# Altium PCB correctCore.PcbDoc (part 1 of 2)
Units mil, origin at the board's own origin, x right, y up, seen from the top; angles counter-clockwise.
Board outline 4175 x 4095 mil, 4 copper layers (Top Layer, GND, PWR, Bottom Layer), stack 43.711 mil thick; 90 components, 157 nets, 637 pads, 423 vias.
Unrouted connection lines stored in the file: 94.
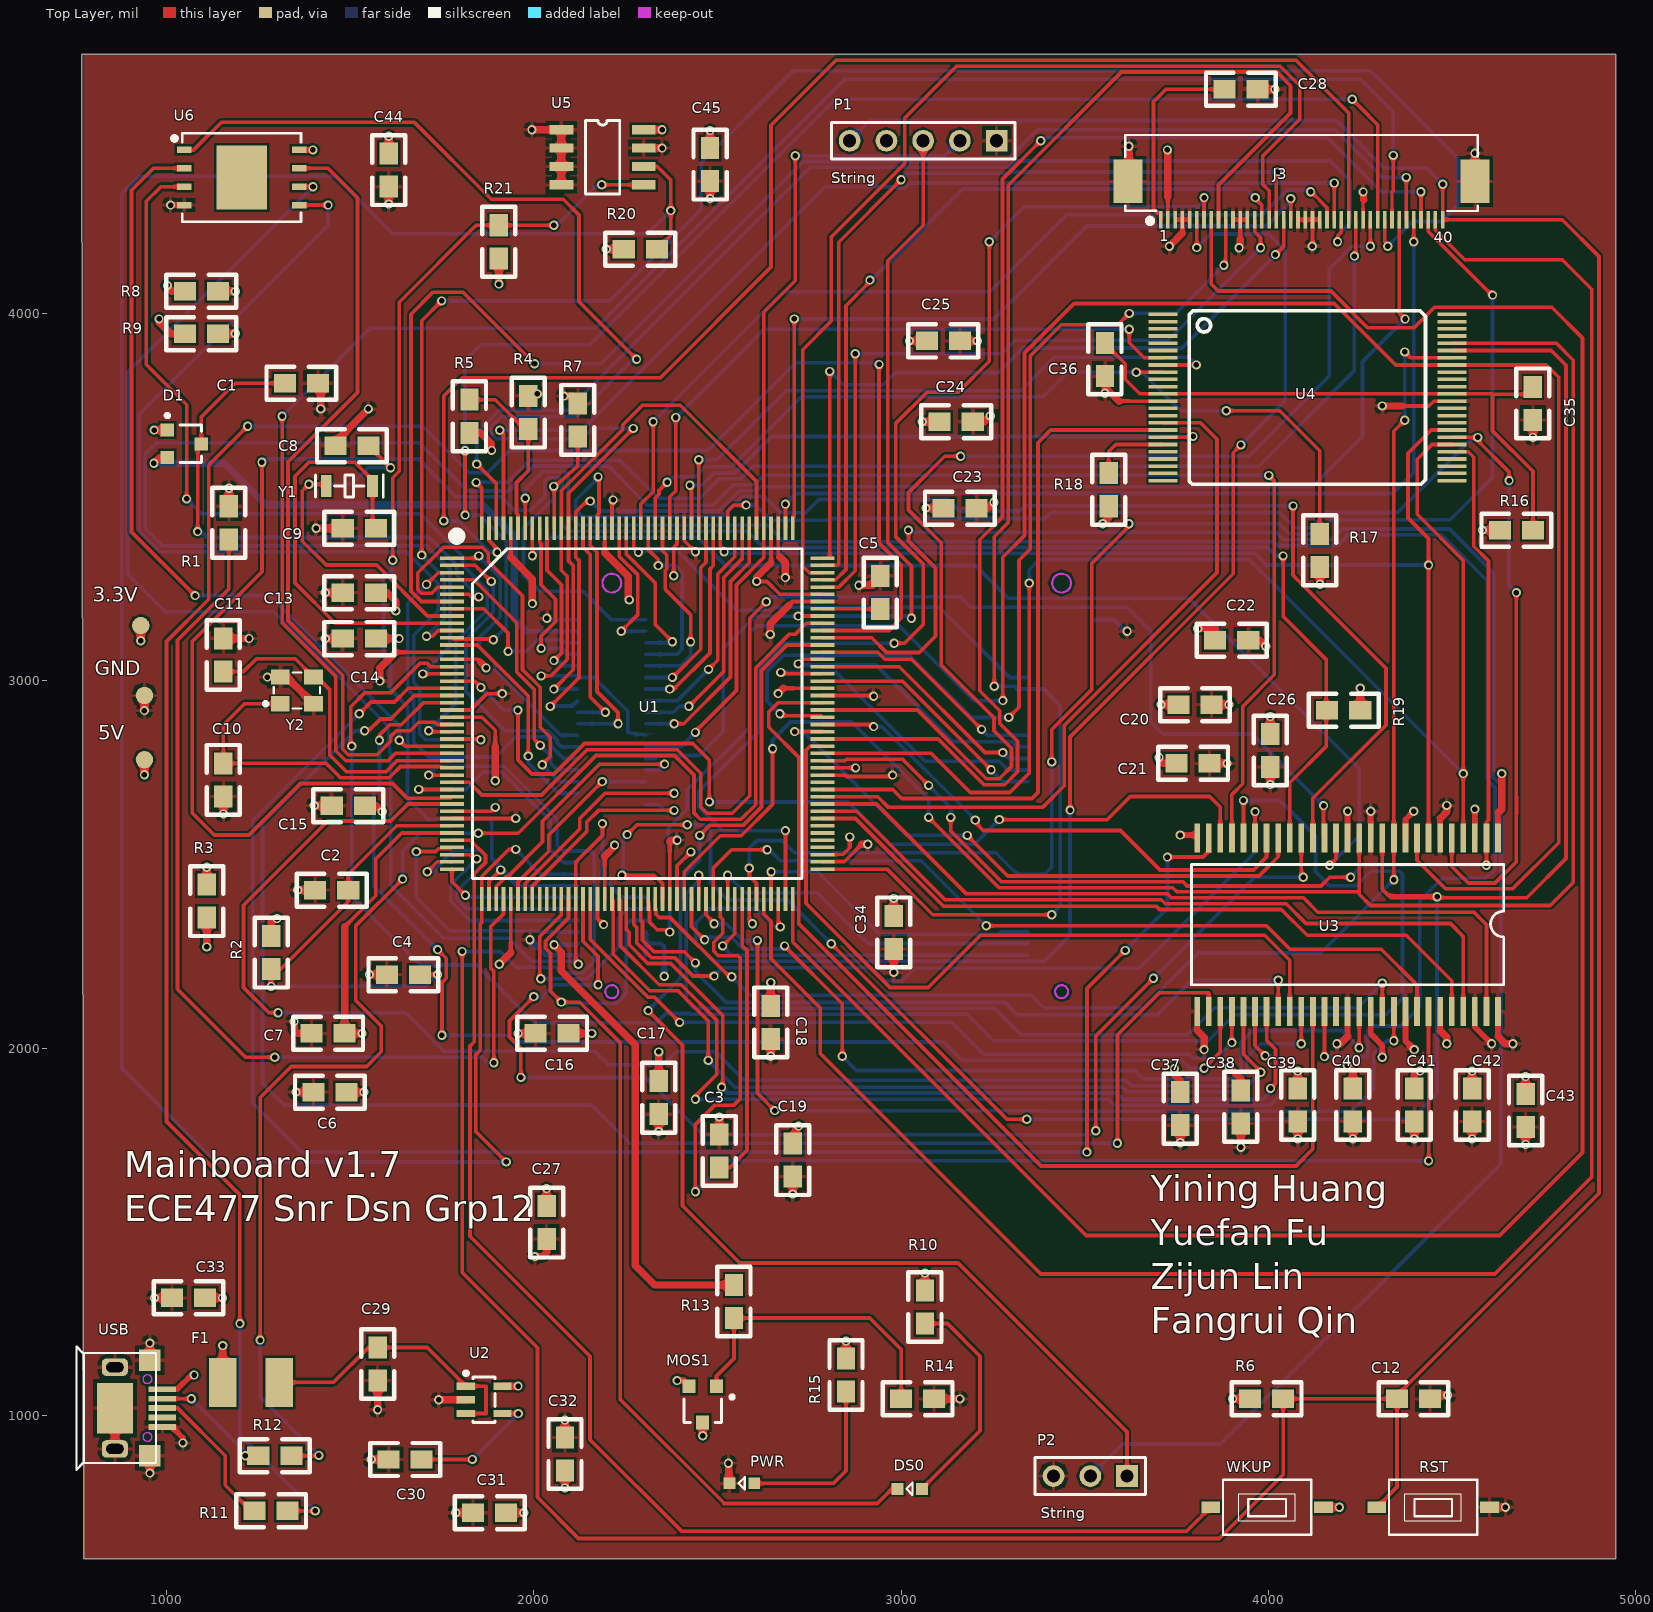
[diagram p0: Top Layer view]
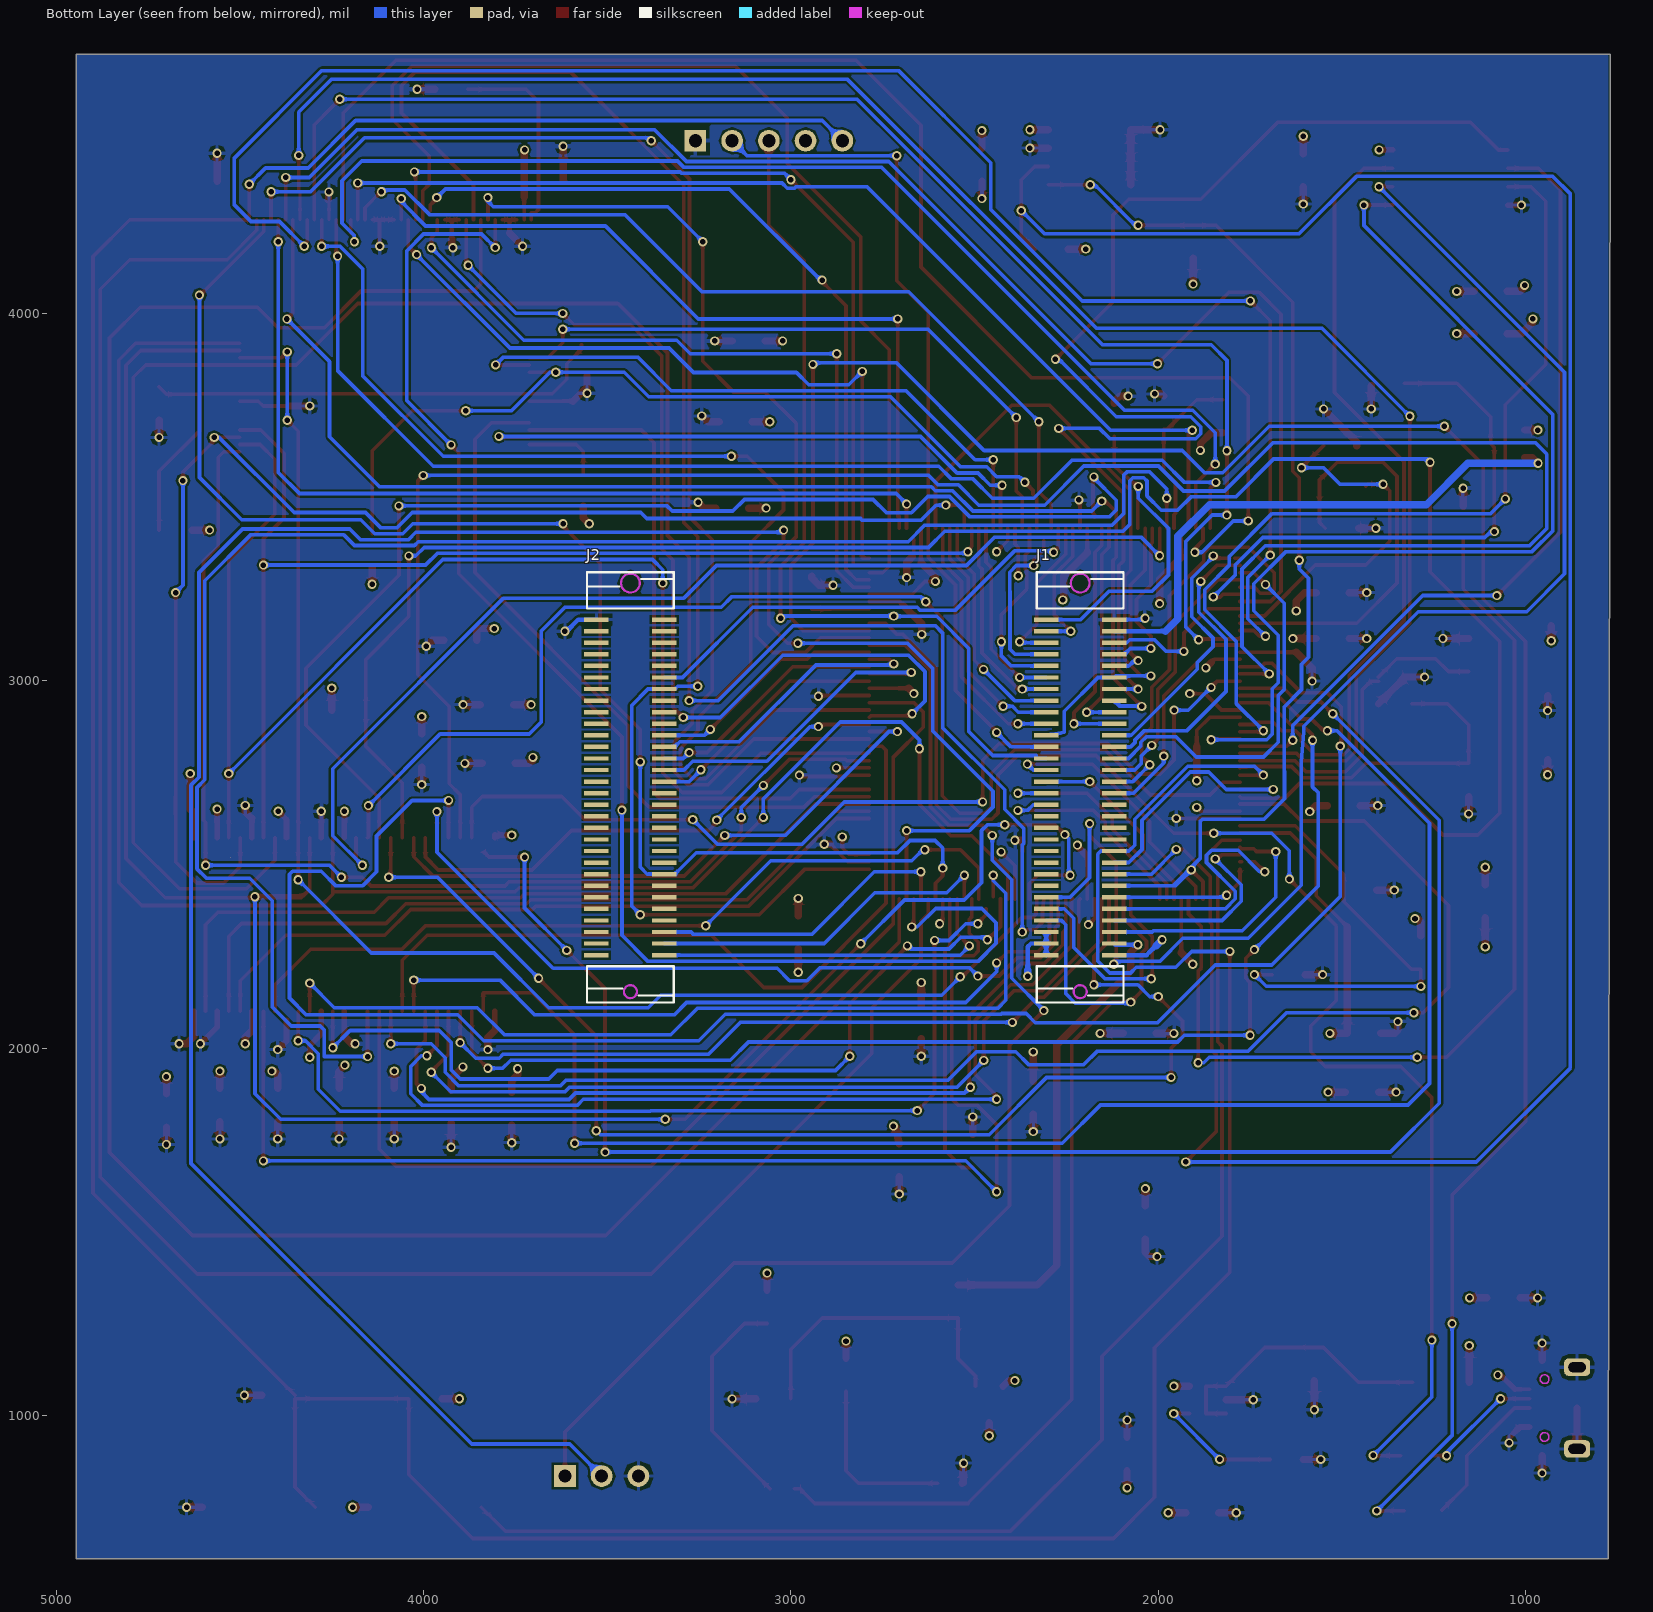
[diagram p1: Bottom Layer view, seen from below]
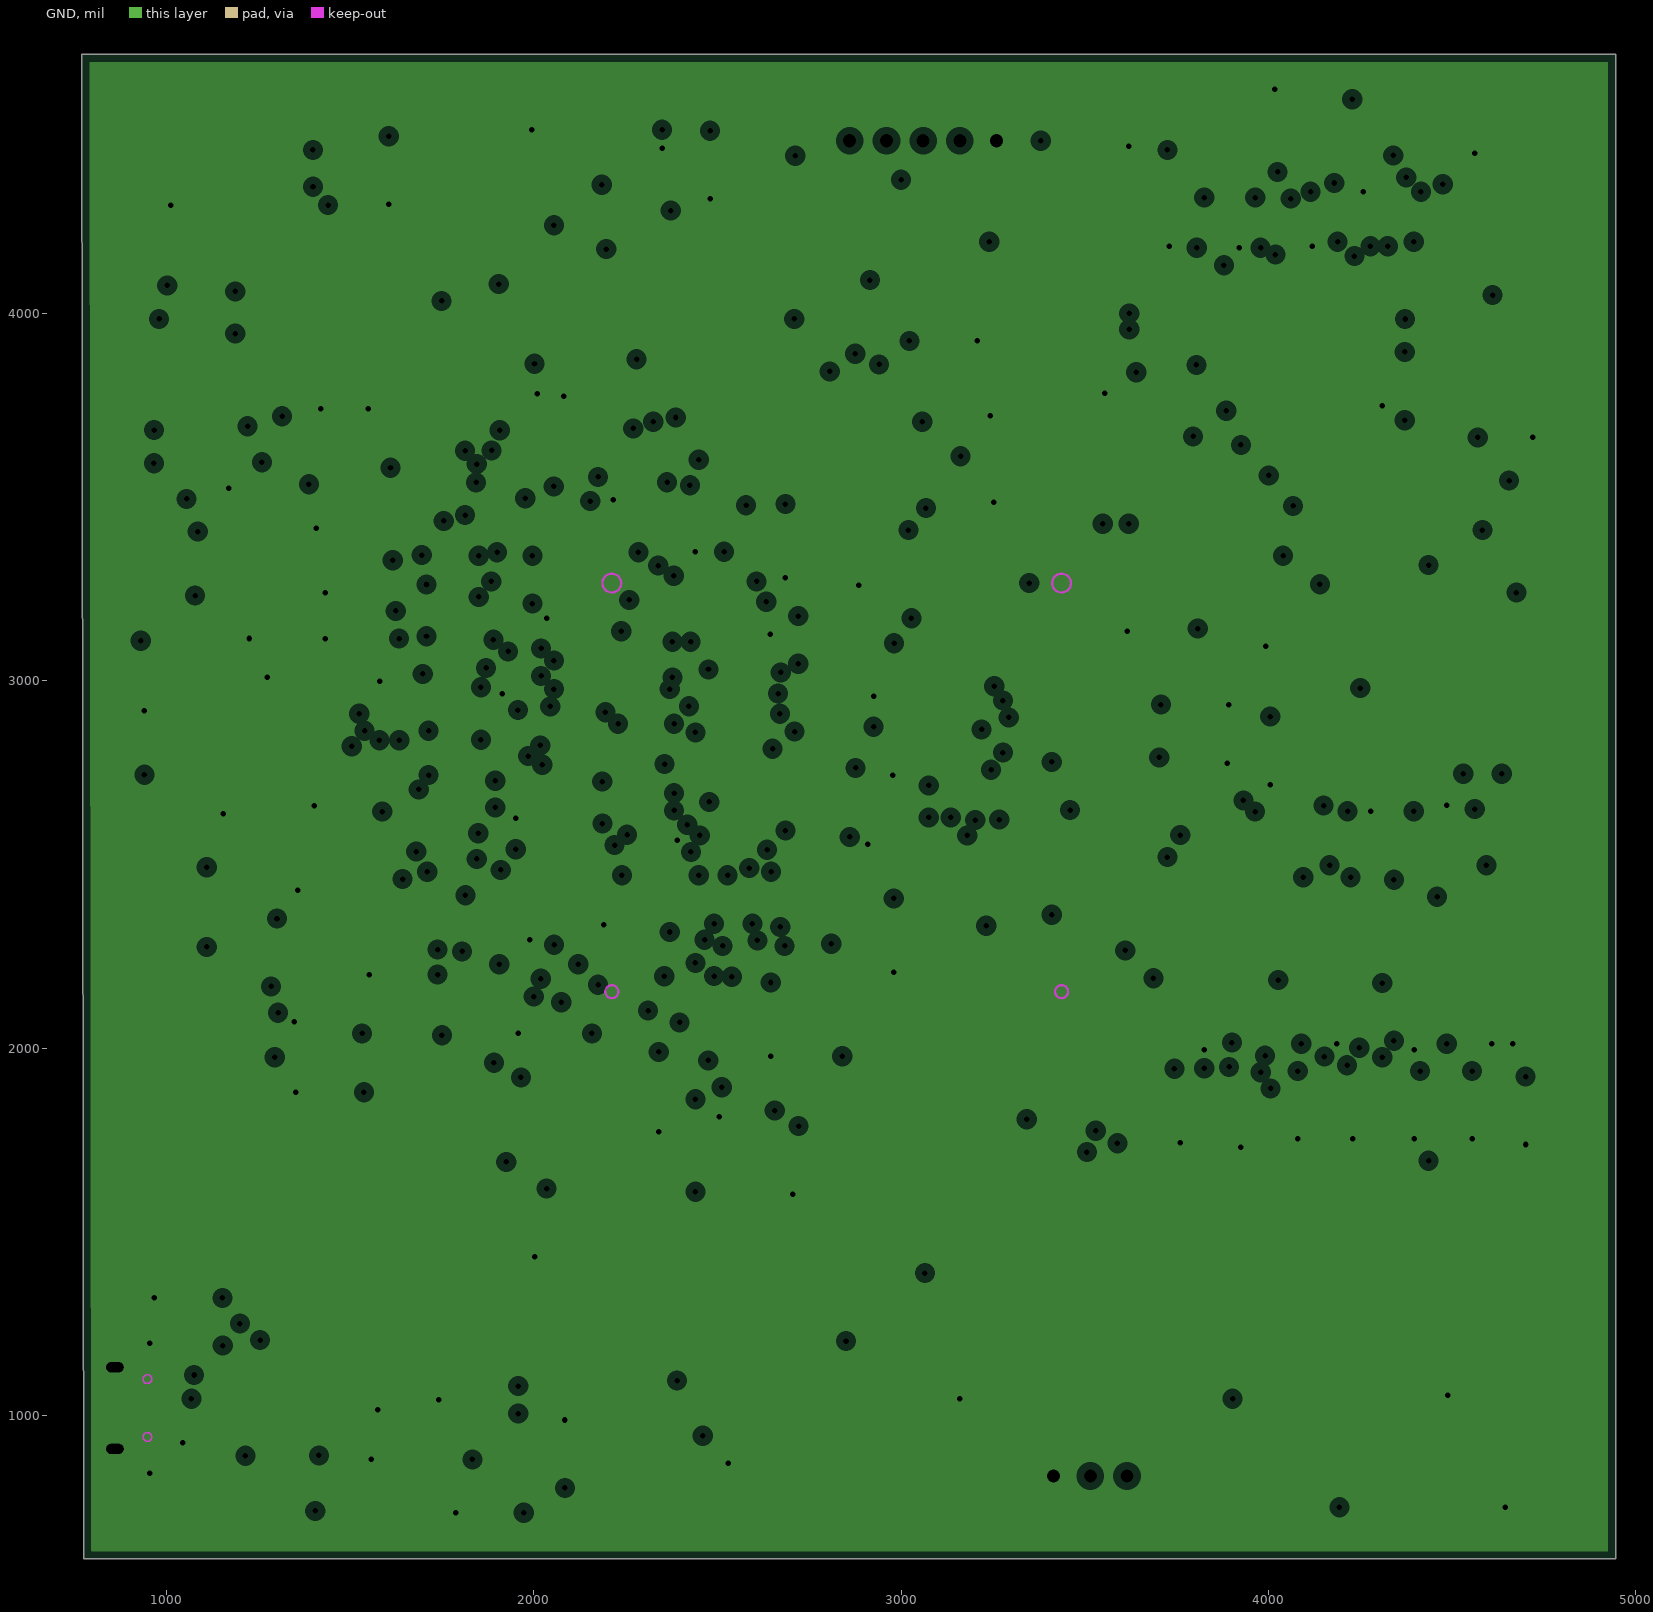
[diagram p2: GND, clearances drawn from the general rule]
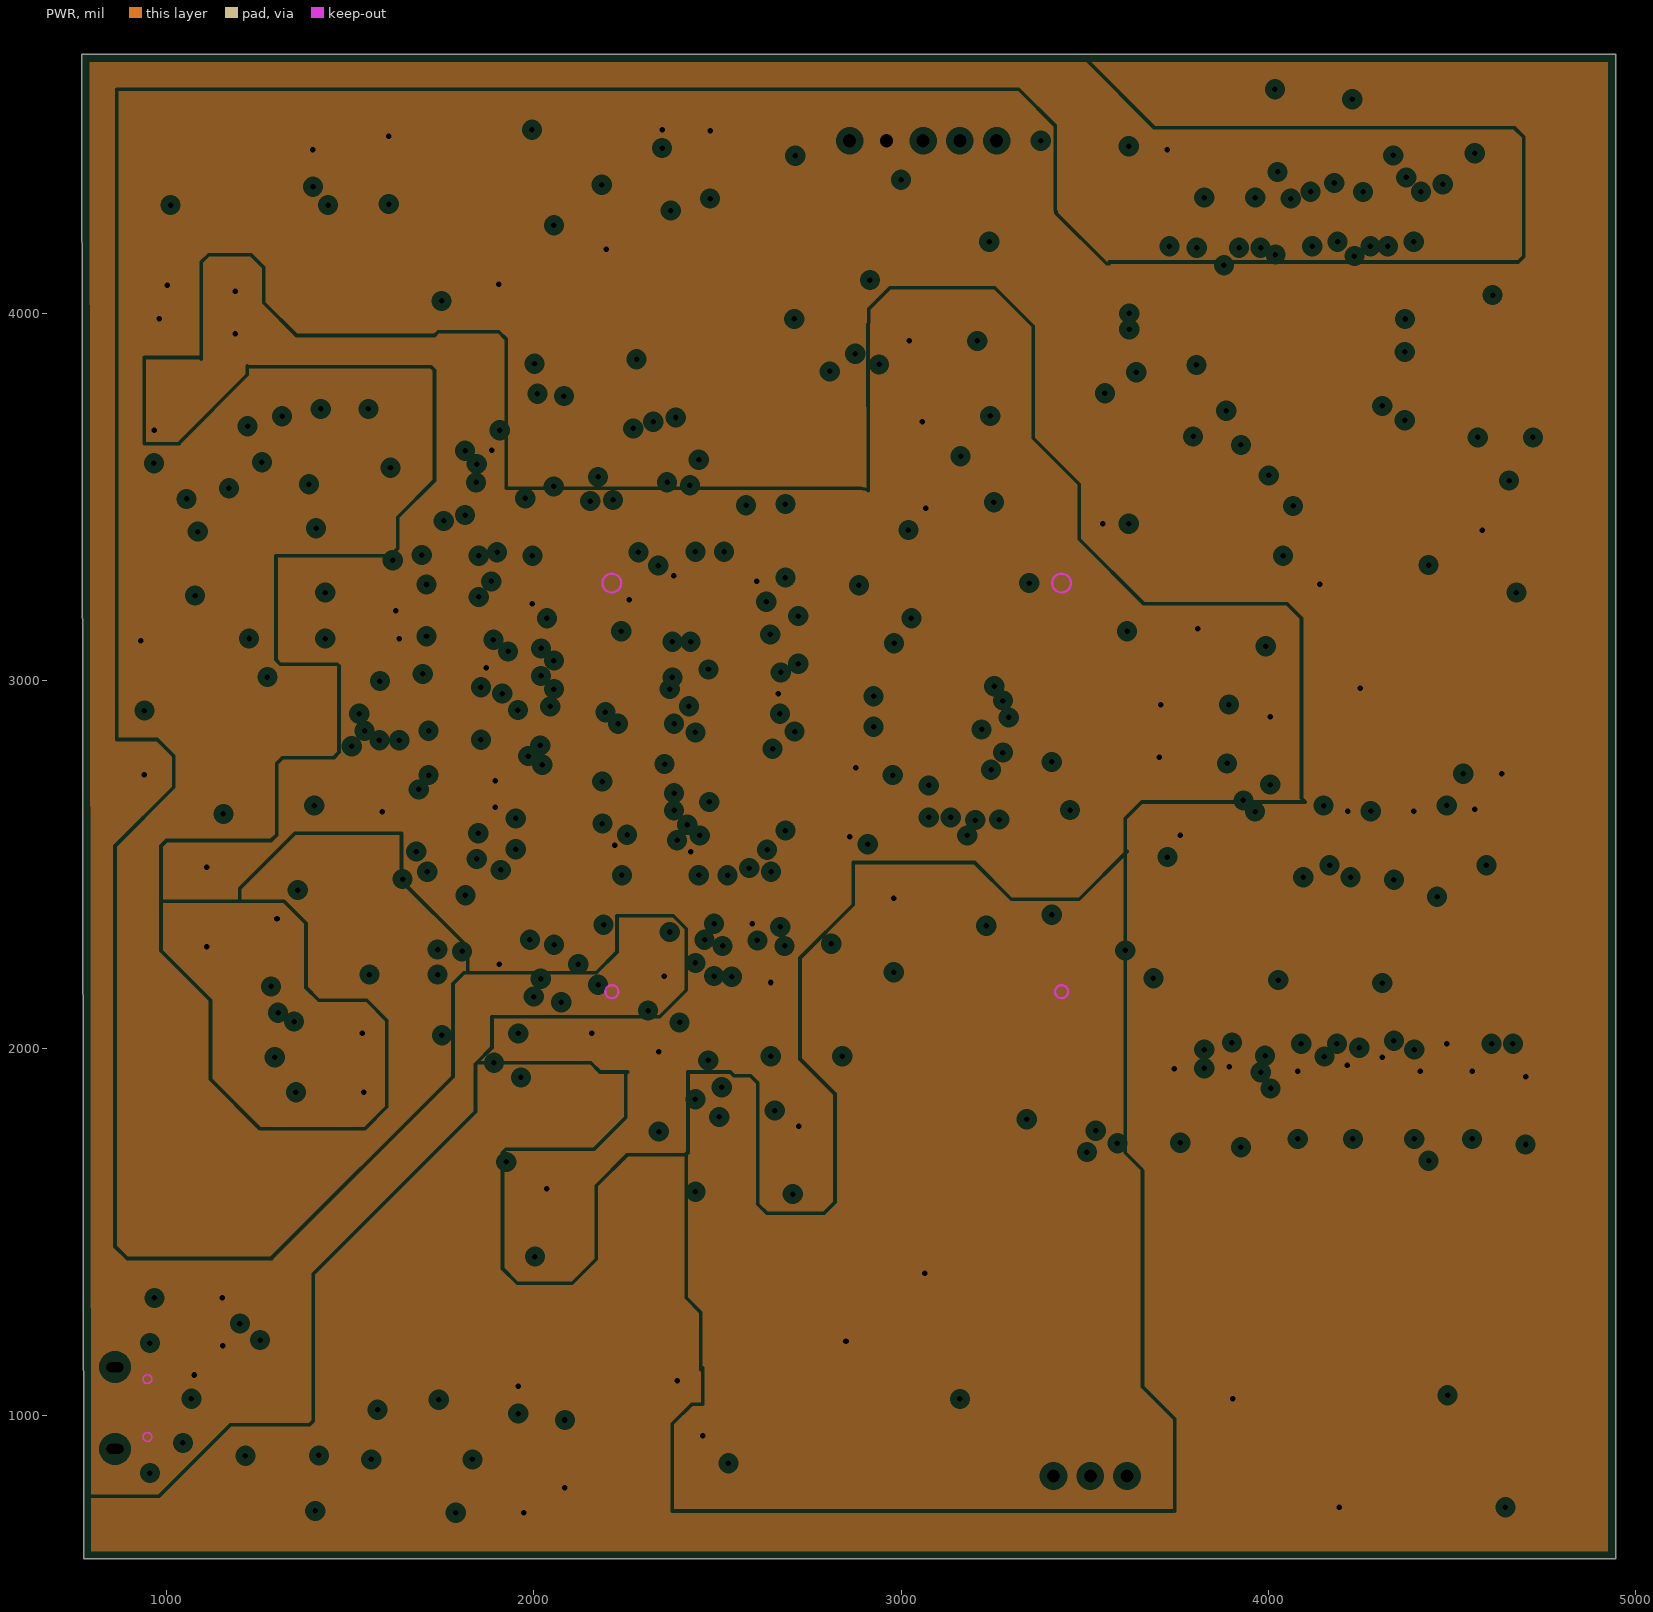
[diagram p3: PWR, clearances drawn from the general rule]

## Layer stack, top to bottom
Top Solder: solder mask 1, SM-001, Dk 4
Top Layer: signal copper 1.3778
Dielectric 1: prepreg 5.1, PP-017, Dk 4.3
GND: plane copper 1.3778, net GND
Dielectric 2: core 28, Core-039, Dk 4.8
PWR: plane copper 1.3778, net (Multiple Nets)
Dielectric 3: prepreg 5.1, PP-017, Dk 4.3
Bottom Layer: signal copper 1.3778
Bottom Solder: solder mask 1, SM-001, Dk 4

## Board outline
770,4705 4945,4705 4945,610 775,610
cut-out: 4525,2520

## Design rules (kind name [scope] priority, off if disabled: settings)
Clearance Clearance_1 [All] p1: gap=6 ignorepadtopadclearanceinfootprint=TRUE except(0: Arc-Hole Track-Hole SMDPad-Hole THPad-Hole Via-Hole Fill-Hole Poly-Hole Region-Hole Text-Hole)
Clearance Clearance_gnd [(InPolygon)] p2: gap=20 ignorepadtopadclearanceinfootprint=TRUE except(0: Arc-Hole Track-Hole SMDPad-Hole THPad-Hole Via-Hole Fill-Hole Poly-Hole Region-Hole Text-Hole)
ComponentClearance [All] p1 off: gap=10 collisioncheckmode=3 verticalgap=10 showdistances=FALSE
DiffPairsRouting [All] p1 off: maxlimit=10 minlimit=10 mostfreqgap=10 toplayer_minwidth=15 toplayer_maxwidth=15 toplayer_prefwidth=15 bottomlayer_minwidth=15 bottomlayer_maxwidth=15 bottomlayer_prefwidth=15 maxuncoupledlength=500
FanoutControl Fanout_BGA [IsBGA] p1 off: bgadir=Out bgaviamode=Centered fanoutstyle=Auto fanoutdirection=Alternating viagrid=1 // Fanout_BGA (Default Rule)
FanoutControl Fanout_LCC [IsLCC] p2 off: bgadir=Out bgaviamode=Centered fanoutstyle=Auto fanoutdirection=Alternating viagrid=1 // Fanout_LCC (Default Rule)
FanoutControl Fanout_SOIC [IsSOIC] p3 off: bgadir=Out bgaviamode=Centered fanoutstyle=Auto fanoutdirection=Alternating viagrid=1 // Fanout_SOIC (Default Rule)
FanoutControl Fanout_Small [(CompPinCount < 5)] p4 off: bgadir=Out bgaviamode=Centered fanoutstyle=Auto fanoutdirection=OutThenIn viagrid=1 // Fanout_Small (Default Rule)
FanoutControl Fanout_Default [All] p5 off: bgadir=Out bgaviamode=Centered fanoutstyle=Auto fanoutdirection=Alternating viagrid=1 // Fanout_Default (Default Rule)
Height [All] p1 off: minheight=0 maxheight=1000 prefheight=500
MinimumSolderMaskSliver MinimumSolderMaskSliver_pads [InPadClass('All Pads') vs InPadClass('All Pads')] p1: minsoldermaskwidth=0
MinimumSolderMaskSliver [All] p2: minsoldermaskwidth=10
ParallelSegment ParallelSegment_1 [InNetClass('fmc') vs InNetClass('fmc')] p1: limit=10000 gap=10
ParallelSegment ParallelSegment_2 [InNetClass('qspi') vs InNetClass('qspi')] p2: limit=10000 gap=10
ParallelSegment [InNetClass('dcmi') vs InNetClass('dcmi')] p3: limit=10000 gap=10
ParallelSegment ParallelSegment_3 [InNetClass('spi4') vs InNetClass('spi4')] p4: limit=10000 gap=10
PlaneClearance [All] p1: clearance=20
PlaneConnect PlaneConnect_power [InNetClass('power')] p1: pad.planeconnectstyle=Relief pad.reliefexpansion=20 pad.reliefentries=4 pad.reliefconductorwidth=10 pad.reliefairgap=10 via.planeconnectstyle=Direct via.reliefexpansion=20 via.reliefentries=4 via.reliefconductorwidth=10 via.reliefairgap=10
PlaneConnect PlaneConnect_gnd [InNetClass('gnd')] p2: pad.planeconnectstyle=Relief pad.reliefexpansion=10 pad.reliefentries=4 pad.reliefconductorwidth=10 pad.reliefairgap=10 via.planeconnectstyle=Direct via.reliefexpansion=20 via.reliefentries=4 via.reliefconductorwidth=10 via.reliefairgap=10
PolygonConnect [All] p1: connectstyle=Relief reliefconductorwidth=10 reliefentries=4 polygonreliefangle="90 Angle" airgapwidth=10
RoutingCorners [All] p1 off: cornerstyle=45-Degree minsetback=100 maxsetback=100
RoutingPriority RoutingPriority_dcmi [InNetClass('dcmi')] p1: routingpriority=0
RoutingPriority RoutingPriority_spi4 [InNetClass('spi4')] p2: routingpriority=0
RoutingPriority RoutingPriority_qspi [InNetClass('qspi')] p3: routingpriority=0
RoutingPriority RoutingPriority_fmc [InNetClass('fmc')] p4: routingpriority=0
RoutingTopology [All] p1 off: topology=Shortest
RoutingVias [All] p1: holewidth=15 width=25 viastyle="Through Hole" minholewidth=15 minwidth=25 maxholewidth=15 maxwidth=25
SMDNeckDown [All] p1: percent=100.000
SMDToCorner [All] p1: distance=0
SilkToSilkClearance [All] p1: silktosilkclearance=0
SilkToSolderMaskClearance [IsPad] p1: minsilkscreentomaskgap=0 clearancetoexposedcopper=TRUE
SolderMaskExpansion [All] p1: expansion=4 useseparateexpansions=TRUE expansionbottom=4
Width gnd [InNetClass('gnd')] p1: maxlimit=20 minlimit=9 preferedwidth=20 minimp=50.000000 maximp=50.000000 favimp=50.000000
Width vccgnd [InNetClass('power')] p2: maxlimit=20 minlimit=9 preferedwidth=20 minimp=50.000000 maximp=50.000000 favimp=50.000000 checkconnectedcopper=TRUE
Width [All] p3: maxlimit=20 minlimit=9 preferedwidth=10 minimp=50.000000 maximp=50.000000 favimp=50.000000
14 further rules are at their usual default settings.

## Classes and differential pairs
net class gnd: GND
net class power: VBAT VCC3.3 VCC3.3M VCC5 VCC_LED VDDA VREF+
net class fmc: FMC_A0 FMC_A1 FMC_A2 FMC_A3 FMC_A4 FMC_A5 FMC_A6 FMC_A7 FMC_A8 FMC_A9 FMC_A10 FMC_A11 FMC_A12 FMC_A16_CLE FMC_A17_ALE FMC_BA0 FMC_BA1 FMC_D0 FMC_D1 FMC_D2 FMC_D3 FMC_D4 FMC_D5 FMC_D6 FMC_D7 FMC_D8 FMC_D9 FMC_D10 FMC_D11 FMC_D12 FMC_D13 FMC_D14 FMC_D15 FMC_NBL0 FMC_NBL1 FMC_NCE3 FMC_NE1 FMC_NOE FMC_NWAIT FMC_NWE FMC_SDCKE0 FMC_SDCLK FMC_SDNCAS FMC_SDNE0 FMC_SDNRAS FMC_SDNWE
net class spi4: PE2 PE4 PE5 PE6
net class qspi: PB2 PB6 PF6 PF7 PF8 PF9
net class dcmi: DCMI_D0 DCMI_D1 DCMI_D2 DCMI_D3 DCMI_D4 DCMI_D5 DCMI_D6 DCMI_D7 DCMI_HREF DCMI_PLCK DCMI_SCL DCMI_SDA DCMI_XCLK
component class stm: C1 C2 C3 C4 C5 C6 C7 C8 C9 C10 C11 C12 C13 C14 C15 C16 C17 C18 C19 C20 C21 C22 C23 C24 C25 C26 C27 D1 J1 J2 P1 R1 R2 R3 R4 R5 R6 R7 R8 R9 RST U1 Y1 Y2
component class mem: C35 C36 C37 C38 C39 C40 C41 C42 C43 C44 C45 R16 R17 R18 R19 R20 R21 U3 U4 U5 U6
component class circuit: 3.3V 5V C28 C29 C30 C31 C32 C33 C34 DS0 F1 GND J3 MOS1 P2 PWR R10 R11 R12 R13 R14 R15 U2 USB WKUP

## Components (designator, comment, footprint, x,y, rotation, side; value= is the part's Value field where it differs from the comment)
3.3V "TEST POINT" TP-1.5 930,3150 r90 top locked
5V "TEST POINT" TP-1.5 940,2785 r0 top locked
C1 "104" 0805 1322.5,3810 r0 top
C2 "104" 0805 1405,2430.06 r0 top
C3 "225" 0805 2504.94,1675 r90 top
C4 "225" 0805 1600,2200.06 r0 top
C5 "225" 0805 2943.44,3195 r90 top
C6 "10uF" 0805 1400,1880.06 r0 top
C7 "104" 0805 1395,2040.06 r0 top
C8 "6pF" 0805 1460,3640.06 r0 top
C9 "6pF" 0805 1480,3415.06 r0 top
C10 "22pF" 0805 1155,2685 r90 top
C11 "22pF" 0805 1155.06,3115 r270 top
C12 "104" 0805 4350,1045.13 r0 top
C13 "104" 0805 1480,3240.06 r0 top
C14 "104" 0805 1480,3115 r0 top
C15 "104" 0805 1450,2660.06 r0 top
C16 "104" 0805 2005,2040 r0 top
C17 "104" 0805 2339.94,1820 r90 top
C18 "104" 0805 2644.94,2025 r90 top
C19 "104" 0805 2704.94,1650 r90 top
C20 "104" 0805 3845,2935 r180 top
C21 "104" 0805 3840,2775 r180 top
C22 "104" 0805 3945,3110 r180 top
C23 "104" 0805 3205,3469.94 r180 top
C24 "104" 0805 3195,3705 r180 top
C25 "104" 0805 3160,3925 r180 top
C26 "104" 0805 4004.94,2765 r90 top
C27 "104" 0805 2034.94,1480 r90 top
C28 "104" 0805 3970,4609.94 r180 top
C29 "10uF" 0805 1574.94,1095 r90 top
C30 "103" 0805 1605,880.06 r0 top
C31 "104" 0805 1835,735.06 r0 top
C32 "10uF" 0805 2085.06,940 r270 top
C33 "104" 0805 1105,1319.94 r180 top
C34 "104" 0805 2980.06,2360 r270 top
C35 "104" 0805 4719.94,3710 r90 top
C36 "104" 0805 3554.94,3830 r90 top
C37 "104" 0805 3760,1790 r90 top
C38 "104" 0805 3924.94,1795 r90 top
C39 "104" 0805 4079.94,1800 r90 top
C40 "104" 0805 4229.94,1800 r90 top
C41 "104" 0805 4396.9,1800 r90 top
C42 "104" 0805 4554.39,1800 r90 top
C43 "104" 0805 4699.94,1785 r90 top
C44 "104" 0805 1605.06,4435 r270 top
C45 "104" 0805 2480,4450 r270 top
D1 "BAT54C" SOT-23 1043.74,3645 r270 top
DS0 "LED" SMDLED-0603 3056.93,800 r180 top
F1 "1812L075PR" *1812 1230,1090 r0 top
GND "TEST POINT" TP-1.5 940,2960 r90 top locked
J1 "3710M060046G3FT01" 3710F060046G3FT01 2305,2253 r0 bottom
J2 "3710M060046G3FT01" 3710F060046G3FT01 3529.39,2253 r0 bottom
J3 "RGBLCD" FPC-TOP40 3706.61,4251 r0 top
MOS1 "SI2301" SO-G3/C2.5 2460,1030 r180 top
P1 "SWD" HDR1X5 3260,4470 r180 top
P2 "USART1" HDR1X3 3615,835 r180 top
PWR "LED" SMDLED-0603 2600,815 r180 top
R1 "10K" 0805 1169.94,3385 r90 top
R2 "10R" 0805 1284.94,2215 r90 top
R3 "10R" 0805 1109.94,2355 r90 top
R4 "0R" 0805 1984.94,3685 r90 top
R5 "0R" 0805 1825.06,3765 r270 top
R6 "10K" 0805 4040,1045.06 r180 top
R7 "100K" 0805 2119.94,3665 r90 top
R8 "0R" 0805 1050,4060.06 r0 top
R9 "0R" 0805 1050,3945 r0 top
R10 "1K" 0805 3065,1340 r270 top
R11 "10R" 0805 1330,740 r180 top
R12 "10R" 0805 1340,890 r180 top
R13 "10R" 0805 2545.06,1355 r270 top
R14 "100K" 0805 3090,1044.94 r180 top
R15 "1K" 0805 2849.94,1065 r90 top
R16 "0R" 0805 4720,3409.94 r180 top
R17 "10K" 0805 4139.94,3310 r90 top
R18 "10K" 0805 3565.06,3565 r270 top
R19 "10K" 0805 4250,2920 r180 top
R20 "4.7K" 0805 2335,4175 r180 top
R21 "4.7K" 0805 1905,4240 r270 top
RST "KEY_M" KEY_SOP3625 4295,750 r0 top
U1 "STM32F767IGT6" LQFP176 1777.18,3333.68 r0 top
U2 "CAT6219-330TD" SOT-23-5 1815,1079.8 r0 top
U3 "W9825G6KH" TSOP54 4624.92,2572.44 r270 top
U4 "MT29F4G08" TSOP48 3712.6,3997.48 r0 top
U5 "24C02" SOP-8 2075,4500 r0 top
U6 "W25Q256" WSON8 1205,4370 r0 top
USB "USB-AB" "USB_AB - 5S - B" 775,1020 r90 top
WKUP "KEY_UP" KEY_SOP3625 3842.91,750 r0 top
Y1 "32.768KHz" XTAL3215 1435,3530 r0 top
Y2 "25Mhz" XTAL3225 1310,2937.17 r0 top

## Footprints (in the part's own frame and the unit in brackets; to place one, negate y for a bottom-side part, rotate by r counter-clockwise, add the part's x,y. Pads: shape width x height; smd on the part's side, far side on the other; paste and mask are expansions set on the pad)
0805 [mil]
  rect 60x50 smd: 1(0,-0.06) 2(90,-0.06)
  silkscreen extent -50,-45 140,45
3710F060046G3FT01 [mm]
  rect 1.7x0.3 smd: 1(-4.7,0) 2(-4.7,-0.8) 3(-4.7,-1.6) 4(-4.7,-2.4) 5(-4.7,-3.2) 6(-4.7,-4) 7(-4.7,-4.8) 8(-4.7,-5.6) 9(-4.7,-6.4) 10(-4.7,-7.2) 11(-4.7,-8) 12(-4.7,-8.8) 13(-4.7,-9.6) 14(-4.7,-10.4) 15(-4.7,-11.2) 16(-4.7,-12) 17(-4.7,-12.8) 18(-4.7,-13.6) 19(-4.7,-14.4) 20(-4.7,-15.2) 21(-4.7,-16) 22(-4.7,-16.8) 23(-4.7,-17.6) 24(-4.7,-18.4) 25(-4.7,-19.2) 26(-4.7,-20) 27(-4.7,-20.8) 28(-4.7,-21.6) 29(-4.7,-22.4) 30(-4.7,-23.2) 31(0,-23.2) 32(0,-22.4) 33(0,-21.6) 34(0,-20.8) 35(0,-20) 36(0,-19.2) 37(0,-18.4) 38(0,-17.6) 39(0,-16.8) 40(0,-16) 41(0,-15.2) 42(0,-14.4) 43(0,-13.6) 44(0,-12.8) 45(0,-12) 46(0,-11.2) 47(0,-10.4) 48(0,-9.6) 49(0,-8.8) 50(0,-8) 51(0,-7.2) 52(0,-6.4) 53(0,-5.6) 54(0,-4.8) 55(0,-4) 56(0,-3.2) 57(0,-2.4) 58(0,-1.6) 59(0,-0.8) 60(0,0)
  Keep-Out Layer circle w0.152: c-2.35,2.525 r0.45
  Keep-Out Layer circle w0.152: c-2.35,-25.725 r0.65
  silkscreen extent -5.35,-26.48 0.65,3.27
*1812 [mm]
  rect 1.9x3.4 smd: 1(-1.95,0) 2(1.95,0)
FPC-TOP40 [mm]
  rect 0.25x1.2 smd: 1(0,0.102) 2(0.5,0.102) 3(1,0.102) 4(1.5,0.102) 5(2,0.102) 6(2.5,0.102) 7(3,0.102) 8(3.5,0.102) 9(4,0.102) 10(4.5,0.102) 11(5,0.102) 12(5.5,0.102) 13(6,0.102) 14(6.5,0.102) 15(7,0.102) 16(7.5,0.102) 17(8,0.102) 18(8.5,0.102) 19(9,0.102) 20(9.5,0.102) 21(10,0.102) 22(10.5,0.102) 23(11,0.102) 24(11.5,0.102) 25(12,0.102) 26(12.5,0.102) 27(13,0.102) 28(13.5,0.102) 29(14,0.102) 30(14.5,0.102) 31(15,0.102) 32(15.5,0.102) 33(16,0.102) 34(16.5,0.102) 35(17,0.102) 36(17.5,0.102) 37(18,0.102) 38(18.5,0.102) 39(19,0.102) 40(19.5,0.102)
  rect 2x3 smd: A(-2.25,2.754) B(21.725,2.754)
  silkscreen extent -2.45,-0.15 21.92,5.97
HDR1X3 [mm]
  rect 1.5x1.5 hole 0.9: 1(0,0)
  round 1.5 hole 0.9: 2(2.54,0) 3(5.08,0)
  silkscreen extent -1.27,-1.27 6.35,1.27
HDR1X5 [mm]
  rect 1.5x1.5 hole 0.9: 1(0,0)
  round 1.5 hole 0.9: 2(2.54,0) 3(5.08,0) 4(7.62,0) 5(10.16,0)
  silkscreen extent -1.27,-1.27 11.43,1.27
KEY_SOP3625 [mm]
  rect 1.3x0.8 smd: 1(0,0) 2(7.8,0)
  silkscreen extent 0.85,-1.9 6.95,1.9
LQFP176 [mm]
  rect 1.65x0.254 smd: 1(0,0) 2(0,-0.5) 3(0,-1) 4(0,-1.5) 5(0,-2) 6(0,-2.5) 7(0,-3) 8(0,-3.5) 9(0,-4) 10(0,-4.5) 11(0,-5) 12(0,-5.5) 13(0,-6) 14(0,-6.5) 15(0,-7) 16(0,-7.5) 17(0,-8) 18(0,-8.5) 19(0,-9) 20(0,-9.5) 21(0,-10) 22(0,-10.5) 23(0,-11) 24(0,-11.5) 25(0,-12) 26(0,-12.5) 27(0,-13) 28(0,-13.5) 29(0,-14) 30(0,-14.5) 31(0,-15) 32(0,-15.5) 33(0,-16) 34(0,-16.5) 35(0,-17) 36(0,-17.5) 37(0,-18) 38(0,-18.5) 39(0,-19) 40(0,-19.5) 41(0,-20) 42(0,-20.5) 43(0,-21) 44(0,-21.5) 89(25.631,-21.5) 90(25.631,-21) 91(25.631,-20.5) 92(25.631,-20) 93(25.631,-19.5) 94(25.631,-19) 95(25.631,-18.5) 96(25.631,-18) 97(25.631,-17.5) 98(25.631,-17) 99(25.631,-16.5) 100(25.631,-16) 101(25.631,-15.5) 102(25.631,-15) 103(25.631,-14.5) 104(25.631,-14) 105(25.631,-13.5) 106(25.631,-13) 107(25.631,-12.5) 108(25.631,-12) 109(25.631,-11.5) 110(25.631,-11) 111(25.631,-10.5) 112(25.631,-10) 113(25.631,-9.5) 114(25.631,-9) 115(25.631,-8.5) 116(25.631,-8) 117(25.631,-7.5) 118(25.631,-7) 119(25.631,-6.5) 120(25.631,-6) 121(25.631,-5.5) 122(25.631,-5) 123(25.631,-4.5) 124(25.631,-4) 125(25.631,-3.5) 126(25.631,-3) 127(25.631,-2.5) 128(25.631,-2) 129(25.631,-1.5) 130(25.631,-1) 131(25.631,-0.5) 132(25.631,0)
  rect 0.254x1.65 smd: 45(2.065,-23.566) 46(2.566,-23.566) 47(3.066,-23.566) 48(3.565,-23.566) 49(4.066,-23.566) 50(4.565,-23.566) 51(5.066,-23.566) 52(5.565,-23.566) 53(6.066,-23.566) 54(6.565,-23.566) 55(7.066,-23.566) 56(7.565,-23.566) 57(8.066,-23.566) 58(8.565,-23.566) 59(9.066,-23.566) 60(9.565,-23.566) 61(10.066,-23.566) 62(10.565,-23.566) 63(11.066,-23.566) 64(11.565,-23.566) 65(12.066,-23.566) 66(12.565,-23.566) 67(13.066,-23.566) 68(13.565,-23.566) 69(14.066,-23.566) 70(14.565,-23.566) 71(15.066,-23.566) 72(15.566,-23.566) 73(16.066,-23.566) 74(16.566,-23.566) 75(17.065,-23.566) 76(17.566,-23.566) 77(18.065,-23.566) 78(18.566,-23.566) 79(19.065,-23.566) 80(19.566,-23.566) 81(20.065,-23.566) 82(20.566,-23.566) 83(21.065,-23.566) 84(21.566,-23.566) 85(22.065,-23.566) 86(22.566,-23.566) 87(23.065,-23.566) 88(23.566,-23.566) 133(23.566,2.065) 134(23.065,2.065) 135(22.566,2.065) 136(22.065,2.065) 137(21.566,2.065) 138(21.065,2.065) 139(20.566,2.065) 140(20.065,2.065) 141(19.566,2.065) 142(19.065,2.065) 143(18.566,2.065) 144(18.065,2.065) 145(17.566,2.065) 146(17.065,2.065) 147(16.566,2.065) 148(16.066,2.065) 149(15.566,2.065) 150(15.066,2.065) 151(14.565,2.065) 152(14.066,2.065) 153(13.565,2.065) 154(13.066,2.065) 155(12.565,2.065) 156(12.066,2.065) 157(11.565,2.065) 158(11.066,2.065) 159(10.565,2.065) 160(10.066,2.065) 161(9.565,2.065) 162(9.066,2.065) 163(8.565,2.065) 164(8.066,2.065) 165(7.565,2.065) 166(7.066,2.065) 167(6.565,2.065) 168(6.066,2.065) 169(5.565,2.065) 170(5.066,2.065) 171(4.565,2.065) 172(4.066,2.065) 173(3.565,2.065) 174(3.066,2.065) 175(2.566,2.065) 176(2.065,2.065)
  silkscreen extent 0.04,-22.15 24.22,1.82
SMDLED-0603 [mil]
  rect 32x32 smd: 1(0,0) 2(66.93,0)
  silkscreen extent 26,-17 42,17
SO-G3/C2.5 [mm]
  rect 0.9x0.95 smd: 1(-0.95,-1.25) 2(0.95,-1.25) 3(0,1.25)
  silkscreen extent -2.16,-0.63 1.3,1.25
SOP-8 [mil]
  rect 65x25 smd: 1(0,0) 2(0,-50) 3(0,-100) 4(0,-150) 5(224.41,-150) 6(224.41,-100) 7(224.41,-50) 8(224.41,0)
  silkscreen extent 65,-175 159,25
SOT-23 [mm]
  rect 0.9x0.95 smd: 1(-0.95,-1.048) 2(0.95,-1.048) 3(0,1.302)
  silkscreen extent -2.07,-1.17 1.3,1.3
SOT-23-5 [mil]
  rect 50x20 smd: 1(0,0) 2(0,-37.4) 3(0,-74.8) 4(100,-74.8) 5(100,0)
  silkscreen extent 0,-99 80,35
TP-1.5 [mm]
  round 1.2 smd: 1(0,0)
TSOP48 [mm]
  rect 2x0.25 smd: 1(0,0) 2(0,-0.5) 3(0,-1) 4(0,-1.5) 5(0,-2) 6(0,-2.5) 7(0,-3) 8(0,-3.5) 9(0,-4) 10(0,-4.5) 11(0,-5) 12(0,-5.5) 13(0,-6) 14(0,-6.5) 15(0,-7) 16(0,-7.5) 17(0,-8) 18(0,-8.5) 19(0,-9) 20(0,-9.5) 21(0,-10) 22(0,-10.5) 23(0,-11) 24(0,-11.5) 25(20,-11.5) 26(20,-11) 27(20,-10.5) 28(20,-10) 29(20,-9.5) 30(20,-9) 31(20,-8.5) 32(20,-8) 33(20,-7.5) 34(20,-7) 35(20,-6.5) 36(20,-6) 37(20,-5.5) 38(20,-5) 39(20,-4.5) 40(20,-4) 41(20,-3.5) 42(20,-3) 43(20,-2.5) 44(20,-2) 45(20,-1.5) 46(20,-1) 47(20,-0.5) 48(20,0)
  silkscreen extent 1.83,-11.75 18.17,0.25
TSOP54 [mm]
  rect 2x0.4 smd: 1(0,0) 2(0,-0.8) 3(0,-1.6) 4(0,-2.4) 5(0,-3.2) 6(0,-4) 7(0,-4.8) 8(0,-5.6) 9(0,-6.4) 10(0,-7.2) 11(0,-8) 12(0,-8.8) 13(0,-9.6) 14(0,-10.4) 15(0,-11.2) 16(0,-12) 17(0,-12.8) 18(0,-13.6) 19(0,-14.4) 20(0,-15.2) 21(0,-16) 22(0,-16.8) 23(0,-17.6) 24(0,-18.4) 25(0,-19.2) 26(0,-20) 27(0,-20.8) 28(12,-20.8) 29(12,-20) 30(12,-19.2) 31(12,-18.4) 32(12,-17.6) 33(12,-16.8) 34(12,-16) 35(12,-15.2) 36(12,-14.4) 37(12,-13.6) 38(12,-12.8) 39(12,-12) 40(12,-11.2) 41(12,-10.4) 42(12,-9.6) 43(12,-8.8) 44(12,-8) 45(12,-7.2) 46(12,-6.4) 47(12,-5.6) 48(12,-4.8) 49(12,-4) 50(12,-3.2) 51(12,-2.4) 52(12,-1.6) 53(12,-0.8) 54(12,0)
  silkscreen extent 1.83,-21.2 10.16,0.4
"USB_AB - 5S - B" [mm]
  rect 0.4x1.9 smd: 1(1.3,-5.436) 2(0.65,-5.436) 3(0,-5.436) 4(-0.65,-5.436) 5(-1.3,-5.436)
  rrect50% 1.2x1.8 hole 0.7 slot 1.2 at 90 deg: 6(2.825,-2.15) 7(-2.825,-2.15)
  rect 1.5x1.5 smd: 8(-3.302,-4.572) 9(3.302,-4.572)
  rect 3.5x2.5 smd: 9(0,-2.159)
  Keep-Out Layer circle w0.102: c-2,-4.4 r0.3
  Keep-Out Layer circle w0.102: c2,-4.4 r0.3
  silkscreen extent -4.26,-5 4.26,0.51
WSON8 [mm]
  rect 1x0.45 smd: 1(-3.975,1.905) 2(-3.975,0.635) 3(-3.975,-0.635) 4(-3.975,-1.905) 5(3.975,-1.905) 6(3.975,-0.635) 7(3.975,0.635) 8(3.975,1.905)
  rect 3.5x4.4 smd: 9(0,0)
  silkscreen extent -4.8,-3.05 4.1,3.05
XTAL3215 [mm]
  rect 0.75x1.5 smd: 1(0,0) 2(3.2,0)
  silkscreen extent -0.74,-0.75 3.94,0.75
XTAL3225 [mm]
  rect 1.3x1.05 smd: 1(0,0) 2(2.3,0) 3(2.3,1.85) 4(0,1.85)
  silkscreen extent -1.14,-0.33 2.74,2.17

## Part data
3.3V 5V GND: library part TEST-POINT, "测试点"
C1 C2 C3 C4 C5 C6 C7 C8 C9 C10 C11 C12 C13 C14 C15 C16 C17 C18 C19 C20 C21 C22 C23 C24 C25 C26 C27 C28 C29 C30 C31 C32 C33 C34 C35 C36 C37 C38 C39 C40 C41 C42 C43 C44 C45: library part C
D1: "双肖特基二极管"
F1: "PTC Resettable Fuse 0.75A_hold_ 1.5A_trip_ 13.2VDC 100A 0.8W 0.2s 0.1Ohm SMD Solder Pad 1812 T/R", Package="1812 Littelfuse", Availability=Unavailable, MF="Littelfuse Inc.", MP=1812L075PR, Price=None, SnapEDA_Link=https://www.snapeda.com/parts/1812L075PR/Littelfuse%20Inc./view-part/?ref=snap
J1 J2: library part 3710F, "3710F060046G3FT01"
J3: library part FPC-40, "FPC-40P-0.5mm"
MOS1: library part MOS-P, "IRLML6401/SI2301"
P1: library part "Header 5", "Header, 5-Pin", LatestRevisionDate=17-Jul-2002, LatestRevisionNote="Re-released for DXP Platform.", Publisher="Altium Limited"
P2: library part "Header 3", "Header, 3-Pin", LatestRevisionDate=17-Jul-2002, LatestRevisionNote="Re-released for DXP Platform.", Publisher="Altium Limited"
R1 R2 R3 R4 R5 R6 R7 R8 R9 R10 R11 R12 R13 R14 R15 R16 R17 R18 R19 R20 R21: library part R
U2: "3.3V 500mA LDO"
U3: library part IS42S16160B, "32MB SDRAM"
U4: library part K9F2G08U0C, "256MB NAND FLASH"
U5: library part 24C256, "EEPROM"
U6: library part W25Q128, "W25Q128"
USB: "MicroUSB"
WKUP: library part KEY_M
Y1: library part XTAL, "普通晶振"
Y2: library part XTAL_3225, "3225贴片无源晶振"

## Via types
v1: diameter 25, hole 15, Top Layer to Bottom Layer, tented both sides, 423 vias

## Nets (pads, with @x,y where several pads share a name; then routed paths per layer and width w, separated by ;. In a path a pad name is that pad's centre, name@x,y a point inside that pad or via, vN(x,y) a via of type N, cw(c..) or ccw(c..) an arc to the next point about the centre after c; other vN are vias at no path point)
BOOT0: J1.31 R7.1 U1.166 | length 939.2
  Top Layer w10: v1(2054.2,3529) v1@2055.35,3527.84 ; U1.166@2055.35,3415 v1@2055.35,3527.84 ; R7.1@2120,3665 2120,3585 v1@2055.35,3527.84
  Bottom Layer w10: v1(2054.2,3529) 2054.2,3497 1972,3414.8 1972,3288 2016,3244 2133.39,3244 2211,3166.39 J1.31@2305,3166.39
DCMI_D0: J2.16 U1.115 | length 671.4
  Top Layer w10: U1.115@2786.28,2999.04 3003.4,2999.04 v1(3245,2757.44)
  Bottom Layer w10: v1(3245,2757.44) 3277,2725.44 J2.16@3344.35,2725.44
DCMI_D1: J2.17 U1.116 | length 897.5
  Top Layer w10: v1(2672.33,3022.5) 2676.11,3018.72 U1.116@2786.28,3018.72
  Bottom Layer w10: v1(2672.33,3022.5) 2823.76,3022.5 3065.32,2780.94 3267.26,2780.94 3291.26,2756.94 J2.17@3344.35,2756.94
DCMI_D2: J2.18 U1.117 | length 661.6
  Top Layer w10: U1.117@2786.28,3038.41 2994.65,3038.41 3228.62,2804.43 v1(3277,2804.43)
  Bottom Layer w10: v1(3277,2804.43) 3293,2788.43 J2.18@3344.35,2788.43
DCMI_D3: J2.19 U1.118 | length 791
  Top Layer w10: v1(2720,3046) 2732.09,3058.09 U1.118@2786.28,3058.09
  Bottom Layer w10: v1(2720,3046) 2720,3043 2932,3043 3141,2834 3302.93,2834 3317,2819.93 J2.19@3344.35,2819.93
DCMI_D4: J1.39 U1.140 | length 668.6
  Top Layer w10: v1(2422.48,2930.42) 2517,3024.94 2517,3281 2567.16,3331.16 U1.140@2567.16,3415
  Bottom Layer w10: J1.39@2305,2914.42 2380.87,2914.42 2396.87,2930.42 v1(2422.48,2930.42)
DCMI_D5: J1.36 U1.145 | length 516.4
  Top Layer w10: v1(2377.49,3008.91) 2454.5,3085.92 2454.5,3308.1 2468.74,3322.34 U1.145@2468.74,3415
  Bottom Layer w10: J1.36@2305,3008.91 v1(2377.49,3008.91)
DCMI_D6: J1.26 U1.167 | length 455.9
  Top Layer w10: U1.167@2035.67,3415 2035.67,3387.52 2035.8,3387.52 2035.8,3300.58 2075.3,3261.08 2075.3,3075.3 v1(2055,3055)
  Bottom Layer w10: v1(2055,3055) 2065.4,3055 2080,3040.4 J1.26@2119.96,3040.4
DCMI_D7: J1.27 U1.168 | length 468.2
  Top Layer w10: U1.168@2015.98,3415 2015.98,3375.82 2019.8,3372 2019.8,3261.5 2059.3,3222 2059.3,3160.27 2019.8,3120.77 v1(2019.8,3087.9)
  Bottom Layer w10: v1(2019.8,3087.9) 2076.5,3087.9 2092.5,3071.9 J1.27@2119.96,3071.9
DCMI_HREF: J2.3 U1.85 | length 845.9
  Top Layer w10: U1.85@2645.9,2405.91 v1(2645.9,2480)
  Bottom Layer w10: v1(2645.9,2480) 2773,2480 2943.5,2309.5 3265.01,2309.5 3271.5,2315.99 J2.3@3344.35,2315.99
DCMI_PLCK: J1.47 U1.52 | length 604.8
  Top Layer w10: U1.52@1996.3,2405.91 1996.3,2441.3 2144.34,2589.34 2144.34,2615.34 2176,2647 v1(2381.93,2647)
  Bottom Layer w10: J1.47@2305,2662.45 2340.55,2662.45 2356,2647 v1(2381.93,2647)
DCMI_RESET: J1.25 J1.41 U1.138 U1.165 | length 1787.4
  Top Layer w10: v1(2019.8,3013.18) 2046.41,3013.18 2091.3,3058.07 2091.3,3284.74 2075.04,3301 U1.165@2075.04,3415 2075.04,3517 2242.12,3684.08 2242.12,3696 2296.12,3750 2399,3750 2606.53,3542.47 U1.138@2606.53,3415
  Bottom Layer w10: v1(2019.8,3013.18) 2115.69,3013.18 J1.25@2119.96,3008.91 2164.09,3008.91 2256,2917 2256,2859.43 J1.41@2305,2851.43
DCMI_SCL: J1.22 U1.162 | length 600.9
  Top Layer w10: U1.162@2134.09,3415 2134.09,3363.24 2154,3343.34 2154,2955.42 v1(2195,2914.42)
  Bottom Layer w10: J1.22@2119.96,2914.42 v1(2195,2914.42)
DCMI_SDA: J1.21 U1.161 | length 672.9
  Top Layer w10: U1.161@2153.78,3415 2153.78,3368 2172.15,3349.63 2172.15,2970.5 2229.41,2913.25 v1(2229.41,2882.92)
  Bottom Layer w10: J1.21@2119.96,2882.92 v1(2229.41,2882.92)
DCMI_XCLK: J2.20 U1.119 | length 651.8
  Top Layer w10: U1.119@2786.28,3077.78 2936.16,3077.78 2955.34,3058.6 3028.09,3058.6 v1(3219.26,2867.42)
  Bottom Layer w10: v1(3219.26,2867.42) 3235.26,2851.42 J2.20@3344.35,2851.42
ETH_MDC: J1.9 U1.33 | length 691.5
  Top Layer w10: v1(1687.01,2704) 1727,2704 1727.24,2703.76 U1.33@1777.18,2703.76
  Bottom Layer w10: v1(1687.01,2704) 1814.77,2704 1862.27,2751.5 1912.87,2751.5 2044.16,2620.21 2044.16,2540.81 2080,2504.97 J1.9@2119.96,2504.97
ETH_MDIO: J1.4 U1.42 | length 584.5
  Top Layer w10: U1.42@1777.18,2526.6 1826.6,2526.6 1838.19,2515 v1(1845,2515)
  Bottom Layer w10: v1(1845,2515) 1774.32,2444.32 1774.32,2399.64 1826.47,2347.49 J1.4@2119.96,2347.49
FMC_A0: U1.16 U3.23 | length 4983.6
  Top Layer w10: v1(1504.5,2821.93) 1501.5,2824.93 1501.5,2929.21 1539.23,2966.94 1609.94,2966.94 1691,3048 1709.41,3048 1719,3038.41 U1.16@1777.18,3038.41 ; U3.23@3932.01,2572.44 v1(3932.01,2674.01)
  Bottom Layer w10: v1(1504.5,2821.93) 1504.5,2412.5 1691,2226 1845,2226 2002,2069 2334.5,2069 2359.5,2094 2426,2094 2428,2092 3179,2092 3251,2020 3836,2020 3907,2091 4320,2091 4365,2136 4365,2473 4356.5,2481.5 4278.5,2481.5 4238.5,2441.5 4166.5,2441.5 4128,2480 4128,2577.21 4031.2,2674.01 v1(3932.01,2674.01)
FMC_A1: U1.17 U3.24 | length 5745.8
  Top Layer w10: v1(1698,3018.72) U1.17@1777.18,3018.72 ; U3.24@3900.51,2572.44 3900.51,2690 3930,2719.49 3930,2930 4016,3016 4016,3544 v1(4001,3559)
  Bottom Layer w10: v1(1698,3018.72) 1772,3092.72 1772,3304.12 1708.62,3367.5 988.99,3367.5 942,3414.49 942,3617 972.5,3647.5 1688.5,3647.5 1819.5,3516.5 1931.5,3516.5 1999.5,3584.5 2202.5,3584.5 2309,3478 2488.5,3478 2544,3533.5 2599.5,3533.5 2625,3559 v1(4001,3559)
FMC_A2: U1.18 U3.25 | length 2640.4
  Top Layer w10: U1.18@1777.18,2999.04 1839.2,2999.04 v1(1856.23,2982) ; v1(1957,2920) 1957,2784 1995,2746 2055,2746 2138,2829 2433,2829 2478,2784 v1(2478,2670) ; v1(3267,2622) 3561,2622 3624,2685 3840.02,2685 3869.02,2656 U3.25@3869.02,2572.44
  Bottom Layer w10: v1(1856.23,2982) 1918.23,2920 v1(1957,2920) ; v1(2478,2670) 2855,2670 2970,2555 3200,2555 v1(3267,2622)
FMC_A3: U1.19 U3.26 | length 4796.3
  Top Layer w10: v1(1525,2910) 1557,2942 1621,2942 1658.35,2979.35 U1.19@1777.18,2979.35 ; v1(3506,1717) 3506,2162 v1(3610,2266) ; v1(3725,2520) 3821.82,2520 U3.26@3835,2533.18
  Bottom Layer w10: v1(1525,2910) 1235,2620 1235,1850 1368,1717 v1(3506,1717) ; v1(3610,2266) 3725,2381 v1(3725,2520)
FMC_A4: U1.20 U3.29 | length 4405.3
  Top Layer w10: v1(1539.23,2863.81) 1550.31,2863.81 1582.5,2896 1610.9,2896 1674.57,2959.67 U1.20@1777.18,2959.67 ; v1(3589,1741) 3589,2036 3704,2151 3837.52,2151 U3.29@3837.52,2100
  Bottom Layer w10: v1(1539.23,2863.81) 1513.14,2863.81 1261.5,2612.16 1261.5,1903.5 1320,1845 1903.77,1845 2157,1845 2261,1741 v1(3589,1741)
FMC_A5: U1.21 U3.30 | length 3429.3
  Top Layer w10: v1(1580,2838) 1580,2852 1608,2880 1639.51,2880 1699.5,2939.98 U1.21@1777.18,2939.98 ; v1(1738,2268) 1761.5,2244.5 1761.5,2190.27 1750,2178.77 v1(1750,2035) ; v1(3825,1945) 3869.02,1989.02 U3.30@3869.02,2100
  Bottom Layer w10: v1(1580,2838) 1580,2711 1564,2695 1564,2442 v1(1738,2268) ; v1(1750,2035) 1929.2,2035 1947.77,2016.44 3115.56,2016.44 3165,1967 3763,1967 3785,1945 v1(3825,1945)
FMC_A6: U1.60 U3.31 | length 2093.6
  Top Layer w10: U1.60@2153.78,2405.91 2153.78,2295.54 2311.22,2138.1 2328.9,2138.1 v1(2397,2070) ; v1(3900.51,2015) U3.31@3900.51,2100
  Bottom Layer w10: v1(2397,2070) 3137,2070 3224,1983 3783.56,1983 3794.23,1972.34 3857.85,1972.34 v1(3900.51,2015)
FMC_A7: U1.63 U3.32 | length 2340.1
  Top Layer w10: U1.63@2212.83,2405.91 2216.52,2402.22 2216.52,2255.43 2315.76,2156.19 2392.81,2156.19 2475,2074 v1(2475,1966.5) ; U3.32@3932.01,2100 3932.01,1983 3979.11,1935.9 v1(3979.11,1934)
  Bottom Layer w10: v1(2475,1966.5) 2548,1893.5 3602.5,1893.5 3615,1881 3926.11,1881 v1(3979.11,1934)
FMC_A8: U1.64 U3.33 | length 2592.3
  Top Layer w10: U1.64@2232.52,2405.91 2236.2,2402.22 2236.2,2277.81 2341.82,2172.19 2401.56,2172.19 2498.5,2075.25 2498.5,1928.5 2440,1870 v1(2440,1860.5) ; U3.33@3963.5,2100 3963.5,2006.5 v1(3991,1979)
  Bottom Layer w10: v1(2440,1860.5) 3565.22,1860.5 3581.72,1844 4003,1844 4035,1876 4035,1950 4006,1979 v1(3991,1979)
FMC_A9: U1.65 U3.34 | length 2410.4
  Top Layer w10: U1.65@2252.2,2405.91 2252.2,2322.57 2259.6,2315.17 2259.6,2281.19 2310.46,2230.33 2373.04,2230.33 2514.5,2088.87 2514.5,1896.5 v1(2511.5,1893.5) ; U3.34@3995,2100 3995,2021 4019,1997 4019,1903 v1(4006,1890)
  Bottom Layer w10: v1(2511.5,1893.5) 2527.5,1877.5 3586.5,1877.5 3604,1860 3985,1860 4006,1881 v1(4006,1890)
FMC_A10: U1.66 U3.22 | length 2194.5
  Top Layer w10: U1.66@2271.89,2405.91 2271.89,2336.23 2280.05,2328.07 2280.05,2286.25 2319.96,2246.33 2383.36,2246.33 2433.69,2196 v1(2491,2196) ; U3.22@3963.5,2572.44 v1(3963.5,2643.69)
  Bottom Layer w10: v1(2491,2196) 2513.31,2218.31 2921.19,2218.31 2956.5,2183 3003.5,2183 3037.5,2217 3647.32,2217 3963.5,2533.18 v1(3963.5,2643.69)
FMC_A11: U1.67 U3.35 | length 2066.6
  Top Layer w10: U1.67@2291.57,2405.91 2291.57,2347.43 2296.05,2342.95 2296.05,2293.46 2327.17,2262.33 2409.67,2262.33 v1(2440,2232) ; U3.35@4026.5,2100 v1(4026.5,2185)
  Bottom Layer w10: v1(2440,2232) 2440,2208 2524,2124 3284,2124 3317,2091 3698,2091 3792,2185 v1(4026.5,2185)
FMC_A12: U1.106 U3.36 | length 2104.5
  Top Layer w10: U1.106@2786.28,2821.87 2752,2821.87 2741,2810.87 2741,2394 2970,2165 3074,2165 3216,2307 3989.99,2307 4057.99,2239 U3.36@4057.99,2100
FMC_A16_CLE: U1.99 U4.16 | length 1975.1
  Top Layer w9.84: U4.16@3712.6,3702.21 3815.31,3702.21 3860,3657.52
  Top Layer w10: U1.99@2786.28,2684.08 2936.47,2684.08 2964.54,2656 3386,2656 3444,2714 3444,2878.37 3860,3294.37 3860,3657.52
FMC_A17_ALE: U1.100 U4.17 | length 1910
  Top Layer w9.84: 3407.02,3682.52 U4.17@3712.6,3682.52
  Top Layer w10: U1.100@2786.28,2703.76 2977,2703.76 3001.56,2679.2 3356.09,2679.2 3372.5,2695.61 3372.5,3648 3407.02,3682.52
FMC_BA0: U1.108 U3.20 | length 1629.3
  Top Layer w10: v1(2710,2861.63) 2785.89,2861.63 U1.108@2786.28,2861.24 ; v1(3180,2579) 3290.5,2468.5 3974.5,2468.5 4026.5,2520.5 U3.20@4026.5,2572.44
  Bottom Layer w10: v1(2710,2861.63) 2732.95,2861.63 3015.58,2579 v1(3180,2579)
FMC_BA1: U1.109 U3.21 | length 1443.6
  Top Layer w10: U1.109@2786.28,2880.93 2919.07,2880.93 v1(2925,2875) ; v1(3202,2620.86) 3202,2614.46 3223.96,2592.5 3597.5,2592.5 3705,2485 3960,2485 3995,2520 U3.21@3995,2572.44
  Bottom Layer w10: v1(2925,2875) 2948.23,2875 3202,2621.23 v1(3202,2620.86)
FMC_D0: U1.104 U3.2 U4.29 | length 3207.7
  Top Layer w9.84: U4.29@4500,3623.47 4544,3623.47 4559,3608.47 4559,3366
  Top Layer w10: U1.104@2786.28,2782.5 2847.63,2782.5 2851.45,2786.32 3003.68,2786.32 v1(3075,2715) ; v1(3135,2628) 3135,2590.77 3273.27,2452.5 3767.27,2452.5 3778.54,2441.23 4143.38,2441.23 4167.15,2465 v1(4223.47,2465) ; 4559,3366 4599,3326 4599,2620.57 4593.43,2615 U3.2@4593.43,2572.44 v1(4593.43,2497.5)
  Bottom Layer w10: v1(3075,2715) 3135,2655 v1(3135,2628) ; v1(4223.47,2465) 4255.97,2497.5 v1(4593.43,2497.5)
FMC_D1: U1.105 U3.4 U4.30 | length 3810.7
  Top Layer w9.84: 4405,3453 4405,3603 4445.15,3643.15 U4.30@4500,3643.15
  Top Layer w10: U1.105@2786.28,2802.19 2786.41,2802.32 3081.68,2802.32 3188.39,2695.61 3295.61,2695.61 3349,2749 v1(3349,3265.8) ; 4405,3453 4530.43,3327.57 v1(4530.43,2747.07) U3.4@4530.43,2572.44
  Bottom Layer w10: v1(3349,3265.8) 3349,3302 3377,3330 3947.5,3330 v1(4530.43,2747.07)
FMC_D2: U1.142 U3.5 U4.31 | length 3806.3
  Top Layer w9.84: U4.31@4500,3662.84 4500.34,3662.5 v1(4570,3662.5)
  Top Layer w10: U1.142@2527.79,3415 2527.79,3461.79 2544,3478 v1(2578,3478) ; U3.5@4498.94,2572.44 4498.94,2494.56 4544,2449.5 4617,2449.5 4675,2507.5 4675,2637.1 4675.21,2637.1 4675.21,2684.1 4675,2684.1 v1(4675,3240) ; v1(4570,3662.5) 4570,3653.5 4655,3568.5 v1(4655,3545)
  Bottom Layer w10: v1(2578,3478) 2604.75,3478 2645.5,3437.25 2806.25,3437.25 2810.5,3441.5 3392.5,3441.5 3409,3458 4031.08,3458 4073,3416.08 4116.08,3416.08 4158,3458 4352.16,3458 4556.66,3662.5 v1(4570,3662.5) ; v1(4655,3545) 4655,3260 v1(4675,3240)
FMC_D3: U1.143 U3.7 U4.32 | length 3217.3
  Top Layer w9.84: 4380,3619.52 4443,3682.52 U4.32@4500,3682.52
  Top Layer w10: U1.143@2508.11,3415 2508.11,3365.89 2518,3356 v1(2518,3351) ; 4380,3619.52 4380,3443 4435.95,3387.05 4435.95,3324.05 v1(4435.95,3315) U3.7@4435.95,2572.44
  Bottom Layer w10: v1(2518,3351) 2522.35,3346.65 3962.85,3346.65 3994.5,3315 v1(4435.95,3315)
FMC_D4: U1.68 U3.8 U4.41 | length 6158.7
  Top Layer w9.84: 4346.31,3859.69 U4.41@4500,3859.69 4735.31,3859.69
  Top Layer w10: U1.68@2311.26,2405.91 2315,2369.26 2315,2343 2336,2322 2357,2322 ; v1(3277,2945.91) 3277,3336.5 3336,3395.5 3336,3892 3471,4027 4179,4027 4346.31,3859.69 ; U3.8@4404.45,2572.44 4404.45,2511 4481.95,2433.5 4664.5,2433.5 4790,2559 4790,3825.96 4756.27,3859.69 4735.31,3859.69
  Bottom Layer w10: v1@2370,2322 2370,2552.77 2366.5,2556.27 2366.5,2598.34 2418,2649.84 2418,2703 2587,2872 2587,3130 2606.5,3149.5 2994.36,3149.5 3197.94,2945.91 v1(3277,2945.91)
  other v1: 2370,2315.99
FMC_D5: U1.69 U3.10 U4.42 | length 3886.3
  Top Layer w9.84: 4386.63,3879.37 U4.42@4500,3879.37
  Top Layer w10: U1.69@2330.94,2405.91 2330.94,2378.42 2332.84,2378.42 2332.84,2364.35 2341.58,2355.61 2371.16,2355.61 2532.77,2194 v1(2539,2194) ; v1(4341.46,2458) U3.10@4341.46,2572.44 4341.46,3679.46 v1(4371,3709) ; v1(4371,3895) 4386.63,3879.37
  Bottom Layer w10: v1(2539,2194) 2589.07,2143.93 3354.07,2143.93 3388,2110 3659,2110 3808,2259 4142.46,2259 v1(4341.46,2458) ; v1(4371,3709) v1(4371,3895)
FMC_D6: U1.70 U3.11 U4.43 | length 5972.1
  Top Layer w9.84: U4.43@4500,3899.06 4769.94,3899.06
  Top Layer w10: v1(2240,2470.43) 2328.2,2470.43 2350.63,2448 U1.70@2350.63,2405.91 ; v1(2254,2581) 2281,2608 v1(2418,2608) ; v1(2810,2283.99) 3287.99,1806 v1(3342,1806) ; U3.11@4309.96,2572.44 4309.96,2432 4326.96,2415 ; v1(4459,2412) 4456,2415 4326.96,2415 ; 4769.94,3899.06 4810,3859 4810,2516 4703,2409 4332.96,2409 4326.96,2415
  Bottom Layer w10: v1(2240,2470.43) 2243.5,2473.93 2243.5,2570.5 v1(2254,2581) ; v1(2418,2608) 2465,2608 2481,2592 2481,2450 2528,2403 2690.99,2403 v1(2810,2283.99) ; v1(3342,1806) 4389,1806 4459,1876 v1(4459,2412)
FMC_D7: U1.73 U3.13 U4.44 | length 4951.2
  Top Layer w9.84: U4.44@4500,3918.74 4784,3918.74
  Top Layer w10: U1.73@2409.68,2405.91 2409.68,2480 2507.68,2578 2564.63,2578 2650,2663.37 v1(2650,2815) ; v1(3075,2628) 3075.14,2628 3266.64,2436.5 3739.73,2436.5 3751,2425.23 4243.81,2425.23 4246.97,2428.39 ; U3.13@4246.97,2572.44 4246.97,2428.39 ; 4784,3918.74 4830,3872.74 4830,2451 4767.2,2388.2 4277.8,2388.2 4246.97,2419.03 4246.97,2428.39
  Bottom Layer w10: v1(2650,2815) 2650,2838.5 2699.13,2887.63 2865.74,2887.63 3075,2678.36 v1(3075,2628)
FMC_D8: U1.74 U3.42 | length 2377.9
  Top Layer w10: U1.74@2429.37,2405.91 2429.37,2330.63 v1(2465,2295) ; v1(2682.75,2278) 2840,2120.75 v1(2840,1977.5) ; v1(4246.97,2001.03) U3.42@4246.97,2100
  Bottom Layer w10: v1(2465,2295) 2471.5,2301.5 2537.5,2301.5 2569.5,2269.5 2674.25,2269.5 v1(2682.75,2278) ; v1(2840,1977.5) 2878.5,1939 3636,1939 3659,1916 3899.86,1916 3925,1941.14 3925,2016 3957,2048 4200,2048 v1(4246.97,2001.03)
FMC_D9: U1.75 U3.44 | length 2482.5
  Top Layer w10: U1.75@2449.05,2411.8 v1(2449.05,2470.43) ; U3.44@4309.96,2100 v1(4309.96,2177)
  Bottom Layer w10: v1(2449.05,2470.43) 2449.05,2455.57 2415,2421.51 2415,2130 2437,2108 3255,2108 3327,2036 3780,2036 3854,2110 4242.96,2110 v1(4309.96,2177)
FMC_D10: U1.76 U3.45 | length 2571
  Top Layer w10: U1.76@2468.74,2378.42 2468.74,2362.64 2491,2340.38 v1(2491,2338.57) ; v1(2609,2293) 2609,1877 v1(2656.28,1829.72) ; v1(4341.46,2019.85) U3.45@4341.46,2100
  Bottom Layer w10: v1(2491,2338.57) 2523.93,2338.57 2569.5,2293 v1(2609,2293) ; v1(2656.28,1829.72) 3381.28,1829.72 3383,1828 4226.47,1828 4286.47,1888 4286.47,1984.7 4321.62,2019.85 v1(4341.46,2019.85)
FMC_D11: U1.77 U3.47 | length 2244.9
  Top Layer w10: U1.77@2488.42,2405.91 2488.42,2489.89 2538.53,2540 v1(2635,2540) ; v1(3232,2333) 3995,2333 4059,2269 4307,2269 4404.45,2171.55 U3.47@4404.45,2100
  Bottom Layer w10: v1(2635,2540) 2641,2540 2671,2510 3055,2510 v1(3232,2333)
FMC_D12: U1.78 U3.48 | length 3390.2
  Top Layer w10: v1(2440,1609) 2440,1792 2492,1844 2544,1844 2562.5,1862.5 2562.5,2244.66 2555.66,2251.5 2502.5,2251.5 2490,2264 2490,2288 2514.5,2312.5 2514.5,2350.11 2508.11,2356.5 U1.78@2508.11,2405.91 ; v1(4435.95,1693) 4436.47,1693.52 4436.47,1961 4435.95,1961.52 U3.48@4435.95,2100
  Bottom Layer w10: v1(2440,1609) 2524,1693 v1(4435.95,1693)
FMC_D13: U1.96 U3.50 | length 1978.8
  Top Layer w10: U1.96@2786.28,2625.02 2875.98,2625.02 3114.5,2386.5 3694,2386.5 3703.27,2377.23 4035.23,2377.23 4105.46,2307 4375,2307 4498.94,2183.06 U3.50@4498.94,2100
FMC_D14: U1.97 U3.51 | length 2089.3
  Top Layer w10: U1.97@2786.28,2644.71 2878.92,2644.71 3119.5,2404.13 3708.37,2404.13 3719.27,2393.23 4048.34,2393.23 4102.58,2339 4495.43,2339 4530.43,2304 U3.51@4530.43,2100
FMC_D15: U1.98 U3.53 | length 2179.2
  Top Layer w10: U1.98@2786.28,2664.39 2932.86,2664.39 3176.75,2420.5 3724,2420.5 3735.27,2409.23 4095.15,2409.23 4134.38,2370 4559.43,2370 4593.43,2336 U3.53@4593.43,2100
FMC_NBL0: U1.169 U3.15 | length 2986
  Top Layer w10: v1(1996.3,3340.17) U1.169@1996.3,3415 ; v1(4166.5,2497.5) 4183.98,2514.98 U3.15@4183.98,2572.44
  Bottom Layer w10: v1(1996.3,3340.17) 2047.12,3391 2444.77,3391 2522.27,3313.5 3202.79,3313.5 3291.29,3225 3782.13,3225 4246.97,2760.16 4246.97,2577.97 v1(4166.5,2497.5)
FMC_NBL1: U1.170 U3.39 | length 4757.4
  Top Layer w10: U1.170@1976.61,3415 v1(1976.61,3497) ; v1(4152.48,1977) U3.39@4152.48,2100
  Bottom Layer w10: v1(1976.61,3497) 1976.61,3521.92 2023.2,3568.5 2085.2,3568.5 2093.7,3560 2093.7,3455.3 2126,3423 2636.5,3423 2680.85,3378.65 4014.43,3378.65 4025,3368.08 4188,3368.08 4216.92,3397 4471,3397 4595.5,3272.5 4595.5,2730.7 4616.93,2709.28 4616.93,2487.77 4591.16,2462 4473,2462 4412,2401 4412,2112 4360,2060 4281,2060 4270.47,2049.47 4270.47,1977 v1(4152.48,1977)
FMC_NCE3: R17.2 U1.152 U4.9 | length 2426.9
  Top Layer w9.84: v1(3640,3840) U4.9@3712.6,3840
  Top Layer w10: U1.152@2330.94,3415 2330.94,3497.74 2341,3507.8 2341,3518.22 v1(2362.94,3540.16) ; v1(3885,3735) 4031,3735 4140,3626 R17.2@4140,3400
  Bottom Layer w10: v1(2362.94,3540.16) 2378.28,3555.5 2440,3555.5 2466.83,3582.33 2538.33,3582.33 2729,3773 3387,3773 3454,3840 v1(3640,3840) 3655.73,3840 3760.73,3735 v1(3885,3735)
FMC_NE1: J1.35 U1.151 | length 516.3
  Top Layer w10: U1.151@2350.63,3415 2350.63,3354 2362.19,3342.43 2362.19,3303.77 2357.5,3299.07 2357.5,3250 2427,3180.5 v1(2427,3106)
  Bottom Layer w10: J1.35@2305,3040.4 2400,3040.4 2427,3067.4 v1(2427,3106)
FMC_NOE: U1.146 U4.8 | length 1757.4
  Top Layer w9.84: U4.8@3712.6,3859.69 v1(3804,3859.69)
  Top Layer w10: U1.146@2449.05,3415 v1(2449.05,3601.5)
  Bottom Layer w10: v1(2449.05,3601.5) 2498.5,3601.5 2686.5,3789.5 3325.5,3789.5 3417,3881 3782.69,3881 v1(3804,3859.69)
FMC_NWAIT: U1.150 U4.7 | length 1787.9
  Top Layer w9.84: 3621,3920 3661.63,3879.37 U4.7@3712.6,3879.37
  Top Layer w10: U1.150@2370.31,3415 2370.31,3500.53 2386.44,3516.66 v1(2386.44,3716.63) ; 3621,3920 v1(3621,3957)
  Bottom Layer w10: v1(2386.44,3716.63) 2626.81,3957 v1(3621,3957)
FMC_NWE: U1.147 U4.18 | length 1627.2
  Top Layer w9.84: U4.18@3712.6,3662.84 3792.84,3662.84 v1(3795,3665)
  Top Layer w10: v1(2425,3532) 2429.37,3527.63 U1.147@2429.37,3415
  Bottom Layer w10: v1(2425,3532) 2457,3532 2490.5,3565.5 2547.5,3565.5 2647,3665 v1(3795,3665)
FMC_SDCKE0: U1.35 U3.37 | length 4083.7
  Top Layer w10: v1(1304,2096) 1279,2096 1210,2165 1210,2389 1439,2618 1611,2618 1657.39,2664.39 U1.35@1777.18,2664.39 ; v1(4089.49,2011.84) U3.37@4089.49,2100
  Bottom Layer w10: v1(1304,2096) 1651,2096 1756,1991 2167,1991 2203,1955 2353,1955 2388,1990 2495,1990 2573,1912 3613,1912 3628,1897 3904,1897 3941,1934 3941,1973.73 3979.11,2011.84 v1(4089.49,2011.84)
FMC_SDCLK: U1.112 U3.38 | length 2833.6
  Top Layer w10: U1.112@2786.28,2939.98 2664.98,2939.98 2640,2915 2640,2873.37 2720.96,2792.41 2720.96,2339.04 3381,1679 4074.98,1679 4120.98,1725 U3.38@4120.98,2100
FMC_SDNCAS: U1.160 U3.17 | length 3354.6
  Top Layer w10: U1.160@2173.46,3445 2173.46,3451.93 2177.5,3455.96 2177.5,3552.5 v1(2175,3555) ; v1(4066.96,3476) 4066.96,3287.04 4320,3034 4320,2879 4120.98,2679.98 U3.17@4120.98,2572.44
  Bottom Layer w10: v1(2175,3555) 2175,3552 2114.41,3491.41 2114.41,3464.77 2133.17,3446 2512.5,3446 2568,3501.5 2627.5,3501.5 2672,3457 2740,3457 2776.5,3493.5 3126.5,3493.5 3158,3462 3323,3462 3337,3476 v1(4066.96,3476)
FMC_SDNE0: R19.2 U1.34 U3.19 | length 5758.1
  Top Layer w10: v1(1260,3595) 1260,3297 1070,3107 1070,2640 1130,2580 1225,2580 1365.08,2720.08 1615.57,2720.08 1655.15,2680.5 1773.61,2680.5 U1.34@1777.18,2684.08 ; v1(4040,3340) 4040,3175 4156.97,3058.03 4156.97,2820.97 4057.99,2721.99 U3.19@4057.99,2572.44
  Bottom Layer w10: v1(1260,3595) 1268.5,3603.5 1686.09,3603.5 1789.09,3500.5 1910.88,3500.5 1947.38,3464 1991.5,3464 2030.7,3503.2 2030.7,3544 2039.2,3552.5 2069.2,3552.5 2077.7,3544 2077.7,3425.3 2096,3407 2581,3407 2625.35,3362.65 3998.43,3362.65 4021.08,3340 v1(4040,3340)
FMC_SDNRAS: U1.59 U3.18 | length 3445
  Top Layer w10: v1(1965,1920) 1965,1999.2 1934,2030.2 1934,2074 v1(2000,2140) ; U1.59@2134.09,2405.91 2134.09,2290.65 2175,2249.75 v1(2175,2172.19) ; v1(3530,1775) 3530,2033 v1(3687,2190) ; U3.18@4089.49,2572.44 4089.49,2470.51 v1(4095,2465)
  Bottom Layer w10: v1(1965,1920) 2304,1920 2460,1764 3519,1764 v1(3530,1775) ; v1(2000,2140) 2023.16,2140 2055.35,2172.19 v1(2175,2172.19) ; v1(3687,2190) 3962,2465 v1(4095,2465)
FMC_SDNWE: U1.32 U3.16 | length 3561.1
  Top Layer w10: U1.32@1777.18,2723.45 1824.55,2723.45 1859,2689 2021.18,2689 2144.62,2812.44 2390.56,2812.44 2454.5,2748.5 2454.5,2656 2471.5,2639 2540,2639 2588,2687 2588,3170 v1(2633,3215) ; v1(4150,2660) 4150,2574.92 U3.16@4152.48,2572.44
  Bottom Layer w10: v1(2633,3215) 2647,3229 3160.29,3229 3189.29,3200 3615,3200 3680,3135 3680,2887 3712,2855 3955,2855 v1(4150,2660)
GBC_KEY: J1.15 U1.13 | length 616.8
  Top Layer w10: U1.13@1777.18,3097.46 1846.17,3097.46 1975,2968.63 1985,2958.63 v1(1985,2795)
  Bottom Layer w10: v1(1985,2795) 1985,2776.21 2067.26,2693.95 J1.15@2119.96,2693.95
GBC_LED: J1.45 U1.50 | length 533.2
  Top Layer w10: U1.50@1956.93,2405.91 1956.93,2451.93 2041.11,2536.11 2041.11,2580.11 v1(2186.45,2725.44)
  Bottom Layer w10: v1(2186.45,2725.44) J1.45@2305,2725.44